# Altium PCB PCB2.PcbDoc
Units mm, origin at the board's own origin, x right, y up, seen from the top; angles counter-clockwise.
Board outline 229.24 x 110.49 mm, 2 copper layers (Top Layer, Bottom Layer); 63 components, 18 nets, 268 pads, 92 vias.
Unrouted connection lines stored in the file: 59.
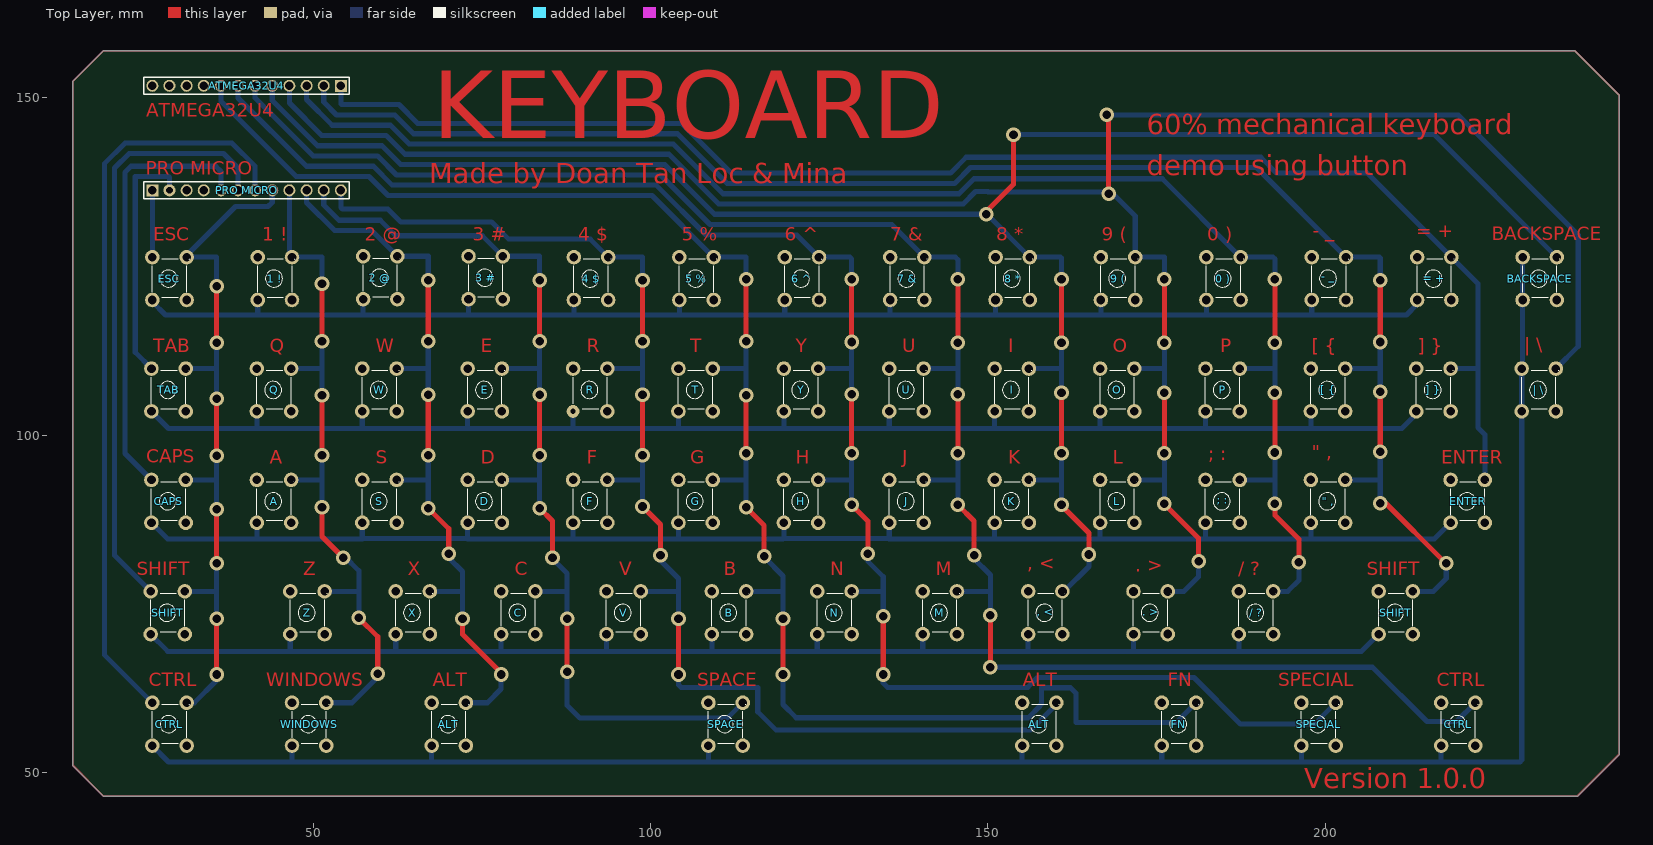
[diagram p0: Top Layer view]
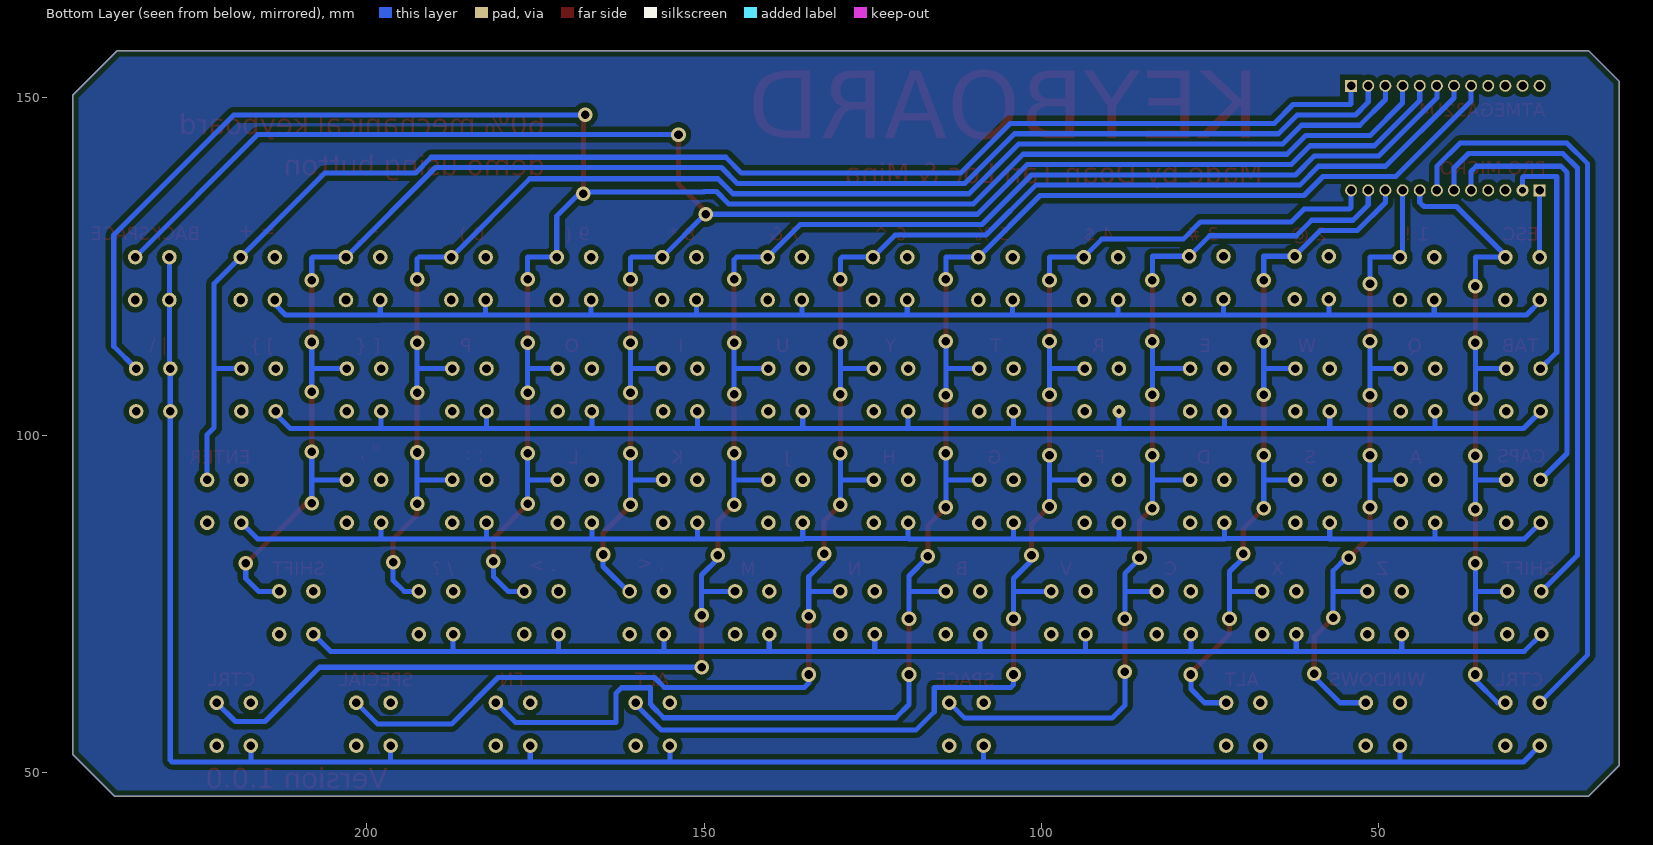
[diagram p1: Bottom Layer view, seen from below]
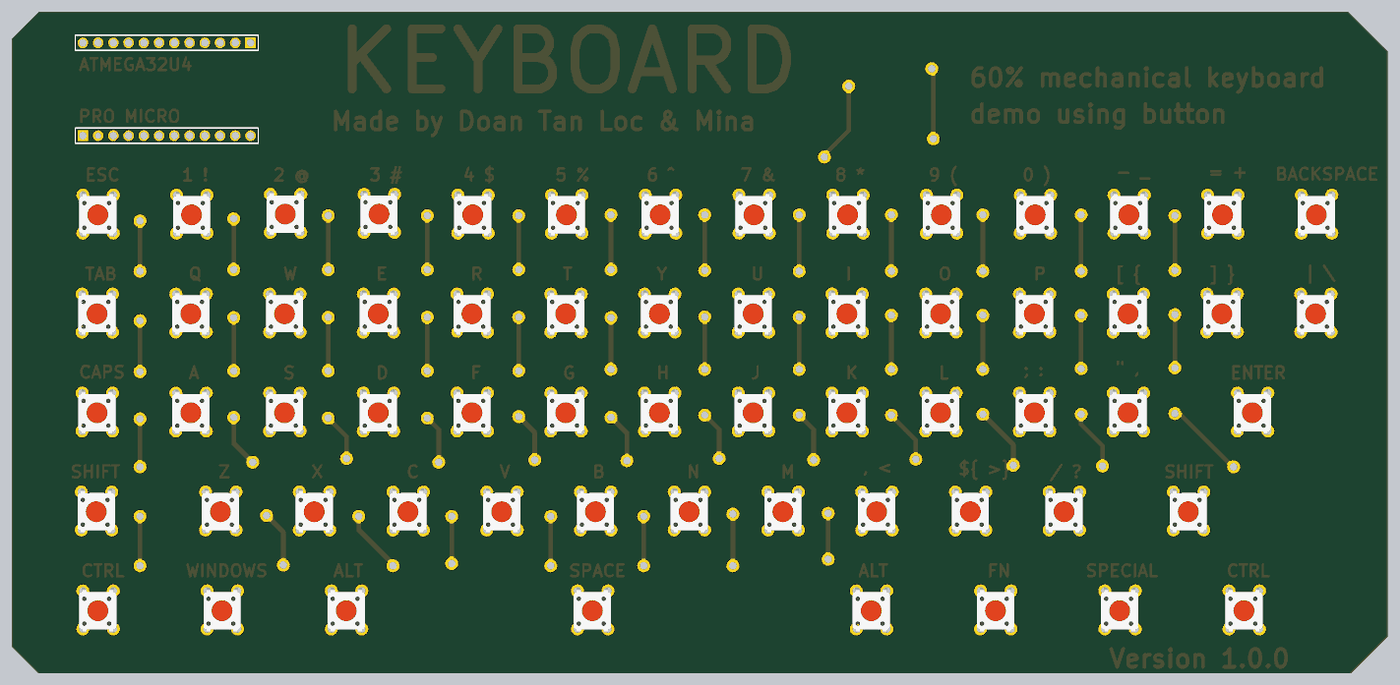
[diagram p2: 3D render of the assembled board from above, using the file's embedded part models]

## Layer stack, top to bottom
Top Solder: solder mask 0.0102, Solder Resist, Dk 3.5
Top Layer: signal copper 0.0356
Dielectric 1: dielectric 0.32, FR-4, Dk 4.8
Bottom Layer: signal copper 0.0356
Bottom Solder: solder mask 0.0102, Solder Resist, Dk 3.5

## Board outline
17.145,48.26 14.351,51.054 14.351,63.119 14.351,152.4 18.923,156.972 236.982,156.972 243.586,150.368 243.586,123.761 243.586,76.391 243.586,52.705 237.363,46.482 18.923,46.482

## Design rules (kind name [scope] priority, off if disabled: settings)
Clearance [All] p1: gap=0.762 ignorepadtopadclearanceinfootprint=FALSE
HoleSize [IsVia] p1: absolutevalues=TRUE maxlimit=2.54 minlimit=0.025 maxpercent=80.000 minpercent=20.000
PolygonConnect [All] p1: connectstyle=Relief reliefconductorwidth=0.254 reliefentries=4 polygonreliefangle="90 Angle" airgapwidth=0.254
RoutingVias [All] p1: holewidth=1.27 width=2.032 viastyle="Through Hole" minholewidth=1.27 minwidth=1.27 maxholewidth=1.27 maxwidth=2.032
SolderMaskExpansion [All] p1: expansion=0.102
Width [All] p1: maxlimit=0.762 minlimit=0.254 preferedwidth=0.762
29 further rules are at their usual default settings.

## Classes and differential pairs
component class Sheet1: "0 )" "1 !" "2 @" "3 #" "4 $" "5 %" "6 ^" "7 &" "8 *" "9 (" "\" ," ", <" "- _" ". >" "/ ?" "; :" "= +" "[ {" A ALT ATMEGA32U4 B BACKSPACE C CAPS CTRL D E ENTER ESC F FN G H I J K L M N O P "PRO MICRO" Q R S SHIFT SPACE SPECIAL T TAB U V W WINDOWS X Y Z

## Components (designator, comment, footprint, x,y, rotation, side; value= is the part's Value field where it differs from the comment)
"0 )" "SW" SW4#1 182.372,120.015 r90 top value="Button chip 4 pin" (schematic designator 0)
"1 !" "SW" SW4#1 41.783,120.015 r90 top value="Button chip 4 pin" (schematic designator 1)
"2 @" "SW" SW4#1 57.404,120.142 r90 top value="Button chip 4 pin" (schematic designator 2)
"3 #" "SW" SW4#1 73.025,120.142 r90 top value="Button chip 4 pin" (schematic designator 3)
"4 $" "SW" SW4#1 88.646,120.015 r90 top value="Button chip 4 pin" (schematic designator 4)
"5 %" "SW" SW4#1 104.267,120.015 r90 top value="Button chip 4 pin" (schematic designator 5)
"6 ^" "SW" SW4#1 119.888,120.015 r90 top value="Button chip 4 pin" (schematic designator 6)
"7 &" "SW" SW4#1 135.509,120.015 r90 top value="Button chip 4 pin" (schematic designator 7)
"8 *" "SW" SW4#1 151.13,120.015 r90 top value="Button chip 4 pin" (schematic designator 8)
"9 (" "SW" SW4#1 166.751,120.015 r90 top value="Button chip 4 pin" (schematic designator 9)
"\" ," "SW" SW4#1 197.866,86.995 r90 top value="Button chip 4 pin"
", <" "SW" SW4#2 155.956,70.485 r90 top value="Button chip 4 pin"
"- _" "SW" SW4#1 197.993,120.015 r90 top value="Button chip 4 pin" (schematic designator -)
". >" "SW" SW4#3 171.577,70.485 r90 top value="Button chip 4 pin"
"/ ?" "SW" SW4#1 187.198,70.485 r90 top value="Button chip 4 pin"
"; :" "SW" SW4#1 182.245,86.995 r90 top value="Button chip 4 pin"
"= +" "SW" SW4#1 213.614,120.015 r90 top value="Button chip 4 pin" (schematic designator +)
"[ {" "SW" SW4#1 197.866,103.505 r90 top value="Button chip 4 pin" (schematic designator {)
"] }" "SW" SW4#1 213.487,103.505 r90 top value="Button chip 4 pin" (schematic designator })
A "SW" SW4#1 41.656,86.995 r90 top value="Button chip 4 pin"
ALT "SW" SW4#1 155.067,53.975 r90 top value="Button chip 4 pin"
ALT "SW" SW4#1 67.564,53.975 r90 top value="Button chip 4 pin"
ATMEGA32U4 "MICRO" HDR1X12#1 54.102,151.765 r180 top (schematic designator P1)
B "SW" SW4#1 109.093,70.485 r90 top value="Button chip 4 pin"
BACKSPACE "SW" SW4#1 229.235,120.015 r90 top value="Button chip 4 pin"
C "SW" SW4#1 77.851,70.485 r90 top value="Button chip 4 pin"
CAPS "SW" SW4#1 26.035,86.995 r90 top value="Button chip 4 pin" (schematic designator CAPSLOCK)
CTRL "SW" SW4#1 26.162,53.975 r90 top value="Button chip 4 pin"
CTRL "SW" SW4#1 217.17,53.975 r90 top value="Button chip 4 pin"
D "SW" SW4#1 72.898,86.995 r90 top value="Button chip 4 pin"
E "SW" SW4#1 72.898,103.505 r90 top value="Button chip 4 pin"
ENTER "SW" SW4#1 218.567,86.995 r90 top value="Button chip 4 pin"
ESC "SW" SW4#1 26.162,120.015 r90 top value="Button chip 4 pin"
F "SW" SW4#4 88.519,86.995 r90 top value="Button chip 4 pin"
FN "SW" SW4#1 175.768,53.975 r90 top value="Button chip 4 pin"
G "SW" SW4#1 104.14,86.995 r90 top value="Button chip 4 pin"
H "SW" SW4#1 119.761,86.995 r90 top value="Button chip 4 pin"
I "SW" SW4#1 151.003,103.505 r90 top value="Button chip 4 pin"
J "SW" SW4#1 135.382,86.995 r90 top value="Button chip 4 pin"
K "SW" SW4#1 151.003,86.995 r90 top value="Button chip 4 pin"
L "SW" SW4#1 166.624,86.995 r90 top value="Button chip 4 pin"
M "SW" SW4#1 140.335,70.485 r90 top value="Button chip 4 pin"
N "SW" SW4#1 124.714,70.485 r90 top value="Button chip 4 pin"
O "SW" SW4#1 166.624,103.505 r90 top value="Button chip 4 pin"
P "SW" SW4#1 182.245,103.505 r90 top value="Button chip 4 pin"
"PRO MICRO" "ARDUINO" HDR1X12#2 26.162,136.271 r0 top (schematic designator P0)
Q "SW" SW4#1 41.656,103.505 r90 top value="Button chip 4 pin"
R "SW" SW4#5 88.519,103.505 r90 top value="Button chip 4 pin"
S "SW" SW4#1 57.277,86.995 r90 top value="Button chip 4 pin"
SHIFT "SW" SW4#1 25.908,70.485 r90 top value="Button chip 4 pin"
SHIFT "SW" SW4#1 207.899,70.485 r90 top value="Button chip 4 pin"
SPACE "SW" SW4#1 108.585,53.975 r90 top value="Button chip 4 pin"
SPECIAL "SW" SW4#1 196.469,53.975 r90 top value="Button chip 4 pin"
T "SW" SW4#1 104.14,103.505 r90 top value="Button chip 4 pin"
TAB "SW" SW4#1 26.035,103.505 r90 top value="Button chip 4 pin"
U "SW" SW4#1 135.382,103.505 r90 top value="Button chip 4 pin"
V "SW" SW4#1 93.472,70.485 r90 top value="Button chip 4 pin"
W "SW" SW4#1 57.277,103.505 r90 top value="Button chip 4 pin"
WINDOWS "SW" SW4#1 46.863,53.975 r90 top value="Button chip 4 pin"
X "SW" SW4#1 62.23,70.485 r90 top value="Button chip 4 pin"
Y "SW" SW4#1 119.761,103.505 r90 top value="Button chip 4 pin"
Z "SW" SW4#1 46.609,70.485 r90 top value="Button chip 4 pin"
"| \" "SW" SW4#1 229.108,103.505 r90 top value="Button chip 4 pin"

## Footprints (in the part's own frame and the unit in brackets; to place one, negate y for a bottom-side part, rotate by r counter-clockwise, add the part's x,y. Pads: shape width x height; smd on the part's side, far side on the other; paste and mask are expansions set on the pad)
HDR1X12#1 [mil] "Connector; Header; 12 Position"
  rect 70x70 hole 50: 1(0,0)
  round 70 hole 50: 2(100,0) 3(200,0) 4(300,0) 5(400,0) 6(500,0) 7(600,0) 8(700,0) 9(800,0) 10(900,0) 11(1000,0) 12(1100,0)
  silkscreen extent -50,-50 1150,50
HDR1X12#2 [mil] "Connector; Header; 12 Position"
  rect 70x70 hole 50: 1(0,0)
  round 70 hole 40: 2(100,0)
  round 70 hole 50: 3(200,0) 4(300,0) 5(400,0) 6(500,0) 7(600,0) 8(700,0) 9(800,0) 10(900,0) 11(1000,0) 12(1100,0)
  silkscreen extent -50,-50 1150,50
SW4#1 [mil] "SW button 4pin, 250 x250 mil"
  round 85 hole 50: 1(0,0) 2(250,-200) 3(250,0) 4(0,-200)
  silkscreen extent 15,-215 240,0, body extent -36,-220 276,24, height 276
SW4#2 [mil] "SW button 4pin, 250 x250 mil"
  round 85 hole 50: 1(0,0) 3(250,0) 4(0,-200)
  round 85 hole 52: 2(250,-200)
  silkscreen extent 15,-215 240,0, body extent -36,-220 276,24, height 276
SW4#3 [mil] "SW button 4pin, 250 x250 mil"
  round 85 hole 50: 1(0,0)
  round 85 hole 52: 2(250,-200) 3(250,0) 4(0,-200)
  silkscreen extent 15,-215 240,0, body extent -36,-220 276,24, height 276
SW4#4 [mil] "SW button 4pin, 250 x250 mil"
  round 85 hole 52: 1(0,0) 4(0,-200)
  round 85 hole 50: 2(250,-200) 3(250,0)
  silkscreen extent 15,-215 240,0, body extent -36,-220 276,24, height 276
SW4#5 [mil] "SW button 4pin, 250 x250 mil"
  round 75 hole 31: 1(0,0)
  round 85 hole 50: 2(250,-200) 3(250,0) 4(0,-200)
  silkscreen extent 15,-215 240,0, body extent -36,-220 276,24, height 276

## Part data
"0 )" "1 !" "2 @" "3 #" "4 $" "5 %" "6 ^" "7 &" "8 *" "9 (" "\" ," ", <" "- _" ". >" "/ ?" "; :" "= +" "[ {" "] }" A ALT ALT B BACKSPACE C CAPS CTRL CTRL D E ENTER ESC F FN G H I J K L M N O P Q R S SHIFT SHIFT SPACE SPECIAL T TAB U V W WINDOWS X Y Z "| \": library part SW4, "Switch button 4 pin"
ATMEGA32U4 "PRO MICRO": library part "Header 12", "Header, 12-Pin", LatestRevisionDate=17-Jul-2002, LatestRevisionNote="Re-released for DXP Platform.", Publisher="Altium Limited"

## Via types
v1: diameter 2.159, hole 1.27, Top Layer to Bottom Layer, 92 vias

## Nets (pads, with @x,y where several pads share a name; then routed paths per layer and width w, separated by ;. In a path a pad name is that pad's centre, name@x,y a point inside that pad or via, vN(x,y) a via of type N, cw(c..) or ccw(c..) an arc to the next point about the centre after c; other vN are vias at no path point)
2: "; :.1" "; :.3" "\" ,.1" "\" ,.3" "PRO MICRO.5" A.1 A.3 CAPS.1 CAPS.3 D.1 D.3 ENTER.1 ENTER.3 F.1 F.3 G.1 G.3 H.1 H.3 J.1 J.3 K.1 K.3 L.1 L.3 S.1 S.3 | length 286.4
  Bottom Layer w0.762: CAPS.1 28.448,84.582 41.91,84.582 ; CAPS.3 22.098,97.282 22.098,138.934 22.991,139.827 35.553,139.827 36.322,139.058 36.322,136.271 ; A.1 41.656,84.836 41.91,84.582 ; S.1 57.277,84.582 ; D.1 72.898,84.582 ; F.1 88.519,84.709 88.392,84.582 ; G.1 104.14,84.709 104.013,84.582 ; H.1 119.761,84.709 119.697,84.645 ; J.1 135.382,84.582 ; K.1 151.003,84.582 ; L.1 166.624,84.709 166.497,84.582 ; 182.245,86.995 182.245,84.709 182.118,84.582 ; 197.866,86.995 197.866,84.709 197.993,84.582 ; ENTER.1 216.154,84.582 197.993,84.582 ; 41.91,84.582 57.277,84.582 ; 57.277,84.582 57.34,84.645 72.834,84.645 72.898,84.582 ; 72.898,84.582 88.392,84.582 ; 88.392,84.582 104.013,84.582 ; 104.013,84.582 119.634,84.582 119.697,84.645 ; 119.697,84.645 135.319,84.645 135.382,84.582 ; 135.382,84.582 151.003,84.582 ; 151.003,84.582 166.497,84.582 ; 166.497,84.582 182.118,84.582 ; 182.118,84.582 197.993,84.582
3: ", <.1" ", <.3" ". >.1" ". >.3" "/ ?.1" "/ ?.3" "PRO MICRO.6" B.1 B.3 C.1 C.3 M.1 M.3 N.1 N.3 SHIFT.1 SHIFT.3 V.1 V.3 X.1 X.3 Z.1 Z.3 | length 298.3
  Bottom Layer w0.762: SHIFT.1@25.908,70.485 28.448,67.945 46.482,67.945 ; SHIFT.3@25.908,76.835 20.574,82.169 20.574,139.566 22.74,141.732 36.703,141.732 38.862,139.573 38.862,136.271 ; Z.1 46.609,68.072 46.482,67.945 ; X.1 62.23,67.945 ; C.1 77.851,68.072 77.724,67.945 ; V.1 93.472,68.072 93.599,67.945 ; B.1 109.093,68.199 109.347,67.945 ; N.1 124.714,68.072 124.841,67.945 ; M.1 140.335,68.072 140.462,67.945 ; 155.956,70.485 155.956,68.072 156.083,67.945 ; 171.577,70.485 171.577,68.199 171.831,67.945 ; 187.198,70.485 187.198,67.945 ; SHIFT.1@207.899,70.485 205.359,67.945 187.198,67.945 ; 46.482,67.945 62.23,67.945 ; 62.23,67.945 77.724,67.945 ; 77.724,67.945 93.599,67.945 ; 93.599,67.945 109.347,67.945 ; 109.347,67.945 124.841,67.945 ; 124.841,67.945 140.462,67.945 ; 140.462,67.945 156.083,67.945 ; 156.083,67.945 171.831,67.945 ; 171.831,67.945 187.198,67.945
4: "PRO MICRO.7" "| \.1" "| \.3" ALT.1 ALT.3 BACKSPACE.1 BACKSPACE.3 CTRL.1 CTRL.3 FN.1 FN.3 SPACE.1 SPACE.3 SPECIAL.1 SPECIAL.3 WINDOWS.1 WINDOWS.3 | length 407.3
  Bottom Layer w0.762: CTRL.1@26.162,53.975 28.575,51.562 46.863,51.562 ; CTRL.3@26.162,60.325 19.05,67.437 19.05,140.197 22.109,143.256 37.973,143.256 41.402,139.827 41.402,136.271 ; WINDOWS.1 46.863,51.562 ; ALT.1@67.564,53.975 67.564,51.689 67.691,51.562 ; SPACE.1 108.585,51.816 108.839,51.562 ; ALT.1@155.067,53.975 155.067,51.562 ; FN.1 175.768,51.689 175.895,51.562 ; SPECIAL.1 196.469,51.816 196.215,51.562 ; CTRL.1@217.17,53.975 217.17,51.562 ; BACKSPACE.3 BACKSPACE.1 229.235,109.982 229.108,109.855 229.108,103.505 229.108,51.816 228.854,51.562 217.17,51.562 ; 46.863,51.562 67.691,51.562 ; 67.691,51.562 108.839,51.562 ; 108.839,51.562 155.067,51.562 ; 155.067,51.562 175.895,51.562 ; 175.895,51.562 196.215,51.562 ; 196.215,51.562 217.17,51.562
5: "PRO MICRO.8" CAPS.2 CTRL.2@31.242,60.325 ESC.2 SHIFT.2@30.988,76.835 TAB.2 | length 104.6
  Top Layer w0.762: v1(35.687,64.516) v1(35.687,72.771) ; v1(35.687,81.026) v1(35.687,89.027) ; v1(35.687,96.901) v1(35.687,105.41) ; v1(35.687,113.665) v1(35.687,122.047)
  Bottom Layer w0.762: SHIFT.2@30.988,76.835 35.687,76.835 ; CAPS.2 35.687,93.345 ; TAB.2 35.687,109.855 ; CTRL.2@31.242,60.325 32.385,60.325 35.687,63.627 v1(35.687,64.516) ; v1@35.687,73.025 35.687,76.835 ; v1(35.687,81.026) 35.687,76.835 ; v1(35.687,89.027) 35.687,93.345 ; v1(35.687,96.901) 35.687,93.345 ; v1(35.687,105.41) 35.687,109.855 ; v1(35.687,113.665) 35.687,109.855 ; v1(35.687,122.047) 35.687,126.365 ESC.2 31.242,126.619 38.481,133.858 43.325,133.858 43.942,134.475 43.942,136.271
6: "1 !.2" "PRO MICRO.9" A.2 Q.2 WINDOWS.2 Z.2 | length 103.8
  Top Layer w0.762: v1(51.308,89.281) 51.308,84.963 v1(54.483,81.788) ; v1(51.308,97.028) v1(51.308,105.918) ; v1(51.308,113.919) v1(51.308,122.428) ; v1(56.769,72.898) 59.563,70.104 v1(59.563,64.643)
  Bottom Layer w0.762: 46.482,136.271 46.482,126.746 46.863,126.365 51.308,126.365 v1(51.308,122.428) ; A.2 51.308,93.345 ; Q.2 51.181,109.855 ; v1(51.308,89.281) 51.308,93.345 ; v1(51.308,97.028) 51.308,93.345 ; v1(51.308,105.918) v1(51.308,113.919) ; Z.2 56.769,76.835 ; WINDOWS.2 55.753,60.325 59.563,64.135 v1(59.563,64.643) ; v1(54.483,81.788) 54.61,81.788 54.737,81.915 56.769,79.883 56.769,76.835 ; v1(56.769,72.898) 56.769,76.835
7: "2 @.2" "PRO MICRO.10" ALT.2@72.644,60.325 S.2 W.2 X.2 | length 112
  Top Layer w0.762: v1(67.056,89.154) 70.104,86.106 v1(70.104,82.423) ; v1(67.056,97.028) v1(67.056,105.981) ; v1(67.056,113.919) v1(67.056,122.936) ; v1(72.136,72.771) 72.136,70.485 77.851,64.77 v1(77.851,64.516)
  Bottom Layer w0.762: 49.022,136.271 49.022,134.475 53.195,130.302 58.674,130.302 62.484,126.492 67.056,126.492 v1(67.056,122.936) ; S.2 67.056,93.345 ; W.2 66.992,109.855 ; v1(67.056,89.154) 67.056,93.345 ; v1(67.056,97.028) 67.056,93.345 ; v1(67.056,105.981) v1(67.056,113.919) ; X.2 72.136,76.835 ; v1(70.104,82.423) 70.104,81.788 72.136,79.756 72.136,76.835 ; v1(72.136,72.771) 72.136,76.835 ; ALT.2@72.644,60.325 75.819,60.325 77.851,62.357 v1(77.851,64.516)
8: "3 #.2" "PRO MICRO.11" C.2 D.2 E.2 SPACE.2 | length 149.5
  Top Layer w0.762: v1(83.566,89.154) 85.471,87.249 v1(85.471,81.788) ; v1(83.566,97.028) v1(83.566,105.981) ; v1(83.566,113.919) v1(83.566,122.936) ; v1(87.63,64.897) v1(87.63,72.771)
  Bottom Layer w0.762: 51.562,136.271 51.562,134.09 53.826,131.826 59.944,131.826 62.23,129.54 75.057,129.54 78.105,126.492 83.566,126.492 v1(83.566,122.936) ; D.2 83.566,93.345 ; E.2 83.439,109.855 83.566,109.728 ; C.2 87.376,76.835 87.63,76.581 ; v1(83.566,89.154) 83.566,93.345 ; v1(83.566,97.028) 83.566,93.345 ; v1(83.566,105.981) 83.566,109.728 ; v1(83.566,113.919) 83.566,109.728 ; v1(85.471,81.788) 85.344,81.788 87.63,79.502 87.63,76.581 ; v1(87.63,64.897) 87.63,59.944 89.535,58.039 111.379,58.039 SPACE.2 ; v1(87.63,72.771) 87.63,76.581
9: "4 $.2" "PRO MICRO.12" ALT.2@160.147,60.325 F.2 R.2 V.2 | length 194.8
  Top Layer w0.762: v1(98.806,89.408) 101.473,86.741 v1(101.473,82.169) ; v1(98.806,97.028) v1(98.806,105.981) ; v1(98.806,113.919) v1(98.806,122.936) ; v1(104.14,64.516) v1(104.14,72.771)
  Bottom Layer w0.762: 54.102,136.271 54.102,133.705 54.33,133.477 61.087,133.477 62.992,131.572 76.454,131.572 78.994,129.032 91.059,129.032 93.726,126.365 98.806,126.365 v1(98.806,122.936) ; F.2 98.806,93.345 ; R.2 98.679,109.855 98.806,109.728 ; V.2 104.013,76.835 104.14,76.708 ; v1(98.806,89.408) 98.806,93.345 ; v1(98.806,97.028) 98.806,93.345 ; v1(98.806,105.981) 98.806,109.728 ; v1(98.806,113.919) 98.806,109.728 ; v1(101.473,82.169) 101.473,81.661 101.346,81.534 104.14,78.74 104.14,76.708 ; v1(104.14,64.516) 104.14,62.992 104.521,62.611 115.887,62.611 115.887,58.991 118.618,56.261 156.301,56.261 160.147,60.107 ALT.2@160.147,60.325 ; v1(104.14,72.771) 104.14,76.708
10: "= +.2" "] }.2" ATMEGA32U4.1 ENTER.2 | length 217.8
  Bottom Layer w0.762: ATMEGA32U4.1 54.102,149.098 54.229,148.971 62.712,148.971 65.506,146.177 104.622,146.177 111.988,138.811 144.442,138.811 146.792,141.16 190.433,141.16 192.782,138.811 206.248,138.811 218.694,126.365 222.631,122.428 222.631,109.728 ; 218.567,109.855 222.504,109.855 222.631,109.728 ; ENTER.2 223.647,100.076 222.631,101.092 222.631,109.728
14: "0 ).2" "/ ?.2" "; :.2" ATMEGA32U4.3 P.2 | length 221.2
  Top Layer w0.762: v1(192.532,89.789) 192.532,88.106 196.088,84.55 v1(196.088,81.153) ; v1(192.532,97.409) v1(192.532,106.299) ; v1(192.532,113.665) v1(192.532,123.063)
  Bottom Layer w0.762: ATMEGA32U4.3 49.022,149.733 52.832,145.923 61.449,145.923 64.243,143.129 103.359,143.129 110.725,135.763 145.705,135.763 147.927,137.986 175.832,137.986 187.452,126.365 192.278,126.365 192.532,126.111 v1(192.532,123.063) ; 187.325,93.345 192.405,93.345 192.532,93.472 ; P.2 192.532,109.855 ; 192.278,76.835 194.437,76.835 196.088,78.486 v1(196.088,81.153) ; v1(192.532,89.789) 192.532,93.472 ; v1(192.532,97.409) 192.532,93.472 ; v1(192.532,106.299) 192.532,109.855 ; v1(192.532,113.665) 192.532,109.855
15: "9 (.2" ". >.2" "| \.2" ATMEGA32U4.4 L.2 O.2 | length 321.1
  Top Layer w0.762: v1(167.64,147.447) 167.894,147.193 v1(167.894,135.763) ; v1(176.149,89.789) 181.229,84.709 v1(181.229,81.28) ; v1(176.149,97.282) v1(176.149,106.299) ; v1(176.149,113.665) v1(176.149,123.063)
  Bottom Layer w0.762: ATMEGA32U4.4 46.482,149.199 51.282,144.399 60.818,144.399 63.612,141.605 102.728,141.605 110.094,134.239 146.336,134.239 148.177,136.081 150.019,136.081 150.058,136.041 167.108,136.041 167.386,135.763 v1(167.894,135.763) 168.529,135.763 171.831,132.461 171.831,126.365 176.149,126.365 v1(176.149,123.063) ; v1(167.64,147.447) 219.71,147.447 237.49,129.667 237.49,113.157 234.188,109.855 ; L.2 176.022,93.345 176.149,93.472 ; O.2 176.149,109.855 ; v1(176.149,89.789) 176.149,93.472 ; v1(176.149,97.282) 176.149,93.472 ; v1@176.149,106.045 v1(176.149,106.299) 176.149,109.855 ; v1(176.149,113.665) 176.149,109.855 ; 176.657,76.835 179.07,76.835 181.229,78.994 v1(181.229,81.28)
16: "- _.2" "[ {.2" "\" ,.2" ATMEGA32U4.2 SHIFT.2@212.979,76.835 | length 239.4
  Top Layer w0.762: v1(208.153,89.916) 208.915,89.916 217.551,81.28 217.297,81.026 v1(217.932,81.026) ; v1(208.153,97.536) v1(208.153,106.426) ; v1@208.153,113.665 v1(208.153,113.792) v1(208.153,122.936)
  Bottom Layer w0.762: ATMEGA32U4.2 51.562,149.348 53.463,147.447 62.081,147.447 64.875,144.653 103.991,144.653 111.357,137.287 145.073,137.287 147.423,139.636 189.802,139.636 203.073,126.365 208.026,126.365 208.153,126.238 v1(208.153,122.936) ; 202.946,93.345 208.153,93.345 ; 202.946,109.855 208.026,109.855 208.153,109.982 ; v1(208.153,89.916) 208.153,93.345 ; v1(208.153,97.536) 208.153,93.345 ; v1(208.153,106.426) 208.153,109.982 ; v1(208.153,113.792) 208.153,109.982 ; SHIFT.2@212.979,76.835 216.027,76.835 217.932,78.74 v1(217.932,81.026)
A0: "8 *.2" ", <.2" ATMEGA32U4.5 BACKSPACE.2 I.2 K.2 | length 293.5
  Top Layer w0.762: v1(149.733,132.715) 149.733,133.096 153.797,137.16 v1(153.797,144.526) ; v1(160.909,89.662) 160.909,89.567 164.973,85.503 v1(164.973,82.296) ; v1(160.909,97.282) v1(160.909,106.299) ; v1(160.909,113.665) v1(160.909,123.063)
  Bottom Layer w0.762: ATMEGA32U4.5 43.942,149.584 50.651,142.875 60.187,142.875 62.981,140.081 102.097,140.081 109.463,132.715 v1(149.733,132.715) ; v1(153.797,144.526) 216.154,144.526 BACKSPACE.2 ; K.2 160.909,93.345 ; I.2 160.782,109.855 160.909,109.728 ; v1(160.909,89.662) 160.909,93.345 ; v1(160.909,97.282) 160.909,93.345 ; v1@160.909,106.045 v1(160.909,106.299) 160.909,109.728 ; v1(160.909,113.665) 160.909,109.728 ; v1(160.909,123.063) 160.909,126.238 160.782,126.365 156.21,126.365 v1@149.86,132.715 ; 161.036,76.835 161.29,76.835 164.973,80.518 v1(164.973,82.296) ; v1(149.733,132.715) v1@149.86,132.715 ; v1(149.733,132.715) 149.733,132.842 v1@149.86,132.715
A1: "7 &.2" ATMEGA32U4.6 CTRL.2@222.25,60.325 J.2 M.2 U.2 | length 270.4
  Top Layer w0.762: v1(145.542,89.662) 147.955,87.249 v1(147.955,82.169) ; v1(145.542,97.282) v1(145.542,106.045) ; v1(145.542,113.665) v1(145.542,123.063) ; v1(150.368,65.596) v1(150.368,73.279)
  Bottom Layer w0.762: ATMEGA32U4.6 41.402,149.969 50.02,141.351 59.556,141.351 62.35,138.557 101.466,138.557 108.832,131.191 135.763,131.191 140.589,126.365 145.161,126.365 145.542,125.984 v1(145.542,123.063) ; J.2 145.415,93.345 145.542,93.472 ; U.2 145.542,109.855 ; M.2 150.241,76.835 150.368,76.708 ; v1(145.542,89.662) 145.542,93.472 ; v1(145.542,97.282) 145.542,93.472 ; v1(145.542,106.045) 145.542,109.855 ; v1(145.542,113.665) 145.542,109.855 ; v1(147.955,82.169) 148.209,82.169 147.828,81.788 150.368,79.248 150.368,76.708 ; v1(150.368,65.596) 207.01,65.596 215.075,57.531 219.456,57.531 CTRL.2@222.25,60.325 ; v1@150.368,73.152 v1(150.368,73.279) 150.368,76.708
A2: "6 ^.2" ATMEGA32U4.7 H.2 N.2 SPECIAL.2 Y.2 | length 254.8
  Top Layer w0.762: v1(129.794,89.662) 132.207,87.249 v1(132.207,82.423) ; v1(129.794,97.282) v1(129.794,106.045) ; v1@129.794,113.665 v1(129.794,113.792) v1(129.794,123.063) ; v1(134.493,64.516) v1(134.493,73.152)
  Bottom Layer w0.762: ATMEGA32U4.7 38.862,149.969 49.004,139.827 58.924,139.827 61.718,137.033 100.834,137.033 108.2,129.667 121.666,129.667 124.968,126.365 129.54,126.365 129.794,126.111 v1(129.794,123.063) ; H.2 129.794,93.345 ; Y.2 129.731,109.855 129.794,109.918 ; N.2 134.366,76.835 134.493,76.708 ; v1@129.794,89.408 v1(129.794,89.662) 129.794,93.345 ; v1(129.794,97.282) 129.794,93.345 ; v1(129.794,106.045) 129.794,109.918 ; v1(129.794,113.792) 129.794,109.918 ; v1(132.207,82.423) 132.207,81.28 134.493,78.994 134.493,76.708 ; v1(134.493,64.516) 134.493,63.246 135.128,62.611 155.896,62.611 157.357,64.072 180.53,64.072 187.452,57.15 198.374,57.15 SPECIAL.2 ; v1@134.493,72.898 v1(134.493,73.152) 134.493,76.708
A3: "5 %.2" ATMEGA32U4.8 B.2 FN.2 G.2 T.2 | length 245
  Top Layer w0.762: v1(114.173,89.281) 116.84,86.614 v1(116.84,82.042) ; v1@114.173,97.155 v1(114.173,97.282) v1(114.173,105.918) ; v1(114.173,113.919) v1(114.173,123.063) ; v1(119.634,64.516) v1(119.634,72.771)
  Bottom Layer w0.762: ATMEGA32U4.8 36.322,149.475 47.494,138.303 58.293,138.303 61.087,135.509 100.203,135.509 109.347,126.365 114.173,126.365 v1(114.173,123.063) ; G.2 114.109,93.345 114.173,93.281 ; T.2 114.173,109.855 ; B.2 119.634,76.835 ; v1(114.173,89.281) 114.173,93.281 ; v1(114.173,97.282) 114.173,93.281 ; v1(114.173,105.918) 114.173,109.855 ; v1(114.173,113.919) 114.173,109.855 ; v1(116.84,82.042) 116.84,81.915 119.634,79.121 119.634,76.835 ; v1(119.634,64.516) 119.634,60.071 121.602,58.102 155.988,58.102 157.734,59.849 157.734,59.944 157.924,60.134 157.924,62.484 157.988,62.547 162.243,62.547 163.068,61.722 163.068,57.404 177.927,57.404 FN.2 ; v1(119.634,72.771) 119.634,76.835
RX1: "[ {.1" "[ {.3" "] }.1" "] }.3" "PRO MICRO.2" E.1 E.3 I.1 I.3 O.1 O.3 P.1 P.3 Q.1 Q.3 R.1 R.3 T.1 T.3 TAB.1 TAB.3 U.1 U.3 W.1 W.3 Y.1 Y.3 | length 254.8
  Bottom Layer w0.762: TAB.1 28.575,100.965 41.656,100.965 ; TAB.3 23.622,112.268 23.622,138.303 28.575,138.303 28.702,138.176 28.702,136.271 ; Q.1 41.656,100.965 ; W.1 57.277,101.092 57.404,100.965 ; E.1 72.898,101.092 72.771,100.965 ; R.1 88.519,101.092 88.392,100.965 ; T.1 104.14,101.092 104.267,100.965 ; Y.1 119.761,100.965 ; U.1 135.382,101.219 135.636,100.965 ; I.1 151.003,101.092 150.876,100.965 ; O.1 166.624,101.219 166.37,100.965 ; P.1 182.245,101.092 182.118,100.965 ; 197.866,103.505 197.866,101.092 197.993,100.965 ; 213.487,103.505 213.487,103.124 211.328,100.965 197.993,100.965 ; 41.656,100.965 57.404,100.965 ; 57.404,100.965 72.771,100.965 ; 72.771,100.965 88.392,100.965 ; 88.392,100.965 104.267,100.965 ; 104.267,100.965 119.761,100.965 ; 119.761,100.965 135.636,100.965 ; 135.636,100.965 150.876,100.965 ; 150.876,100.965 166.37,100.965 ; 166.37,100.965 182.118,100.965 ; 182.118,100.965 197.993,100.965
TX0: "0 ).1" "0 ).3" "1 !.1" "1 !.3" "2 @.1" "2 @.3" "3 #.1" "3 #.3" "4 $.1" "4 $.3" "5 %.1" "5 %.3" "6 ^.1" "6 ^.3" "7 &.1" "7 &.3" "8 *.1" "8 *.3" "9 (.1" "9 (.3" "- _.1" "- _.3" "= +.1" "= +.3" "PRO MICRO.1" ESC.1 ESC.3 | length 225
  Bottom Layer w0.762: ESC.1 26.162,119.761 28.13,117.792 41.91,117.792 ; ESC.3 26.162,136.271 ; 41.783,120.015 41.783,117.919 41.91,117.792 ; 57.404,120.142 57.404,117.919 57.277,117.792 ; 73.025,120.142 73.025,117.919 72.898,117.792 ; 88.646,120.015 88.646,117.919 88.519,117.792 ; 104.267,120.015 104.267,117.919 104.14,117.792 ; 119.888,120.015 119.888,117.919 120.015,117.792 ; 135.509,120.015 135.509,117.919 135.382,117.792 ; 151.13,120.015 151.13,117.919 151.257,117.792 ; 166.751,120.015 166.751,117.792 ; 182.372,120.015 182.372,118.046 182.118,117.792 ; 197.993,120.015 197.993,117.919 198.12,117.792 ; 213.614,120.015 213.614,119.38 212.026,117.792 198.12,117.792 ; 41.91,117.792 57.277,117.792 ; 57.277,117.792 72.898,117.792 ; 72.898,117.792 88.519,117.792 ; 88.519,117.792 104.14,117.792 ; 104.14,117.792 120.015,117.792 ; 120.015,117.792 135.382,117.792 ; 135.382,117.792 151.257,117.792 ; 151.257,117.792 166.751,117.792 ; 166.751,117.792 182.118,117.792 ; 182.118,117.792 198.12,117.792
pads on no net: "0 ).4" "1 !.4" "2 @.4" "3 #.4" "4 $.4" "5 %.4" "6 ^.4" "7 &.4" "8 *.4" "9 (.4" ", <.4" "- _.4" ". >.4" "/ ?.4" "; :.4" "= +.4" "[ {.4" "\" ,.4" "] }.4" "PRO MICRO.3" "PRO MICRO.4" "| \.4" A.4 ALT.4 ATMEGA32U4.9 ATMEGA32U4.10 ATMEGA32U4.11 ATMEGA32U4.12 B.4 BACKSPACE.4 C.4 CAPS.4 CTRL.4 D.4 E.4 ENTER.4 ESC.4 F.4 FN.4 G.4 H.4 I.4 J.4 K.4 L.4 M.4 N.4 O.4 P.4 Q.4 R.4 S.4 SHIFT.4 SPACE.4 SPECIAL.4 T.4 TAB.4 U.4 V.4 W.4 WINDOWS.4 X.4 Y.4 Z.4
copper on no net: | length 1333.2
  Top Layer w0.254: 14.351,51.054 18.923,46.482 237.363,46.482 243.586,52.705 243.586,150.368 236.982,156.972 18.923,156.972 14.351,152.4 14.351,51.054
  Bottom Layer w0.254: 14.351,51.054 14.351,53.467 14.351,63.119 14.351,152.4 18.923,156.972 21.59,156.972 236.982,156.972 243.586,150.368 243.586,123.761 243.586,76.391 243.586,52.705 237.363,46.482 31.75,46.482 22.606,46.482 18.923,46.482 17.145,48.26 14.351,51.054

## Polygon pours and split planes (outlines as drawn)
no net on Bottom Layer (solid, pour order 0): 18.923,156.972 14.351,152.4 14.351,51.054 18.923,46.482 237.363,46.482 243.586,52.705 243.586,150.368 236.982,156.972

## Other copper
Top Layer:
  text "60% mechanical keyboard" at 173.574,144.544 h3
  text "KEYBOARD" at 67.691,144.018 h10
  text "demo using button" at 173.574,138.506 h3
  text "Made by Doan Tan Loc & Mina" at 67.183,137.287 h3
  text "Version 1.0.0" at 196.85,47.625 h3